# Altium PCB Acoustics Board.PcbDoc (part 1 of 2)
Units mm, origin at the board's own origin, x right, y up, seen from the top; angles counter-clockwise.
Board outline 152.4 x 101.6 mm, 2 copper layers (Top Layer, Bottom Layer); 115 components, 80 nets, 404 pads, 173 vias.
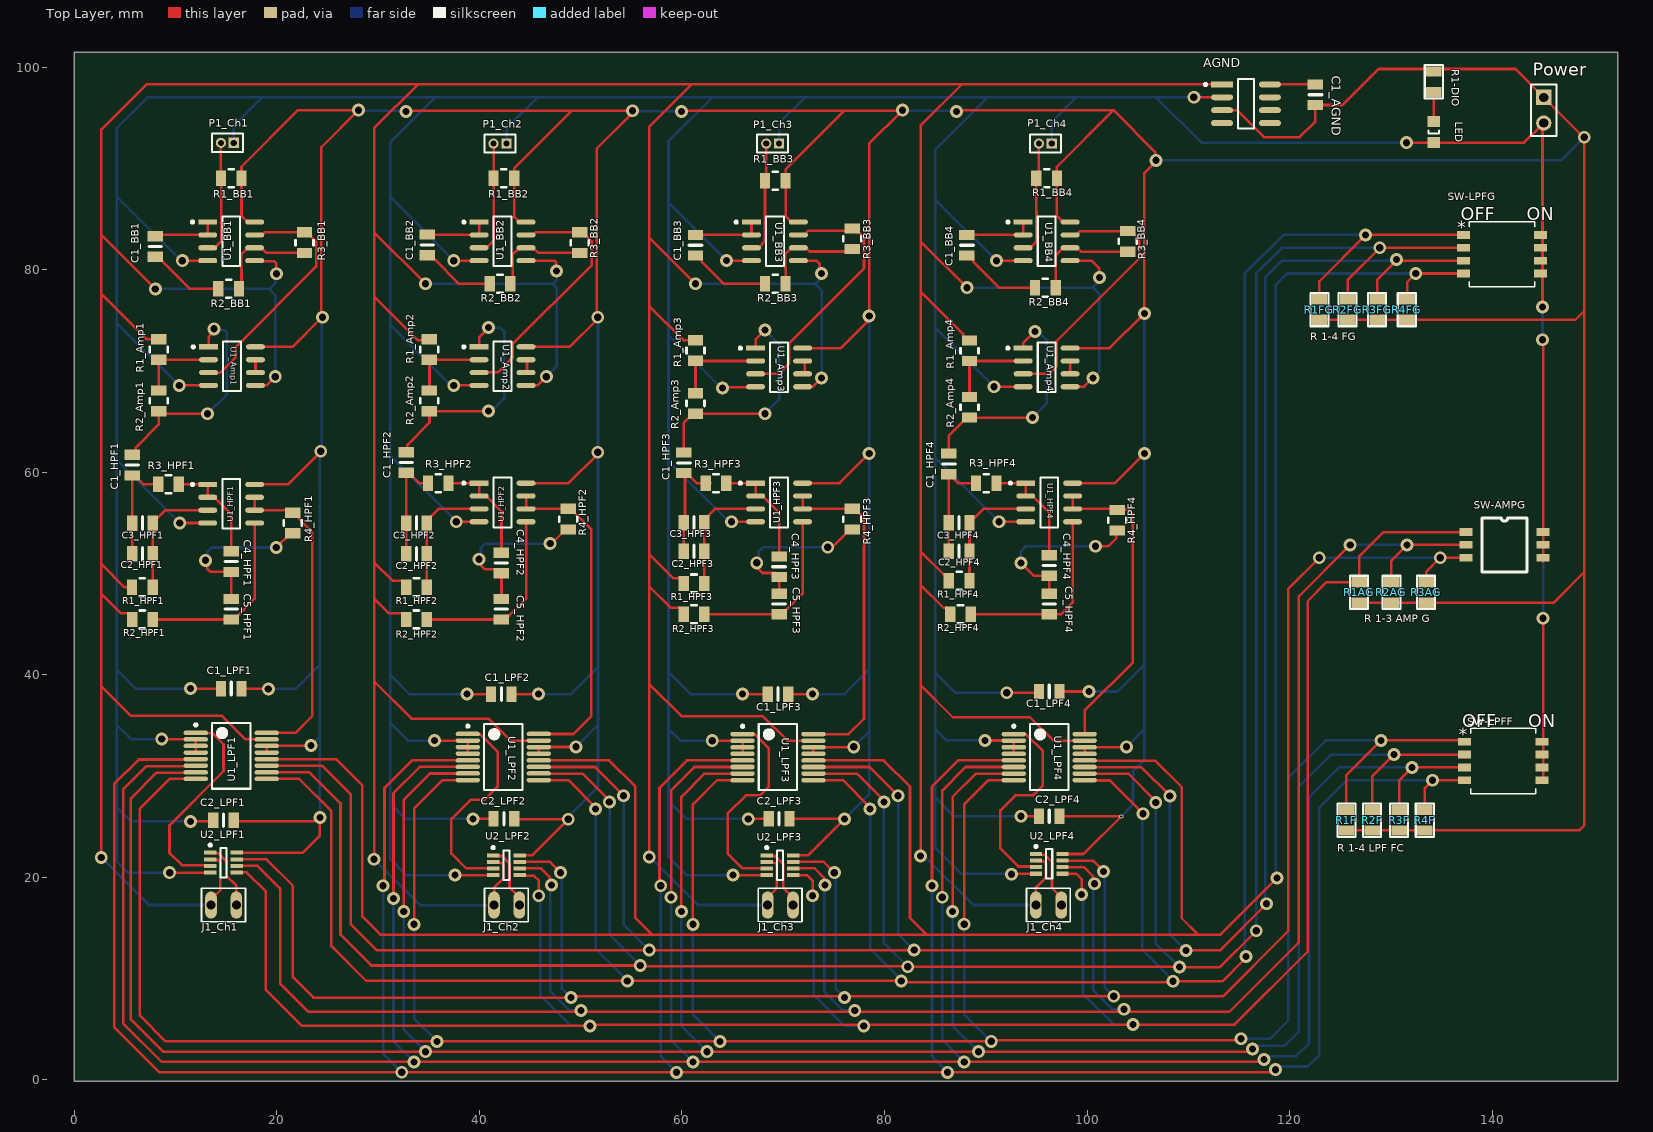
[diagram p0: Top Layer view]
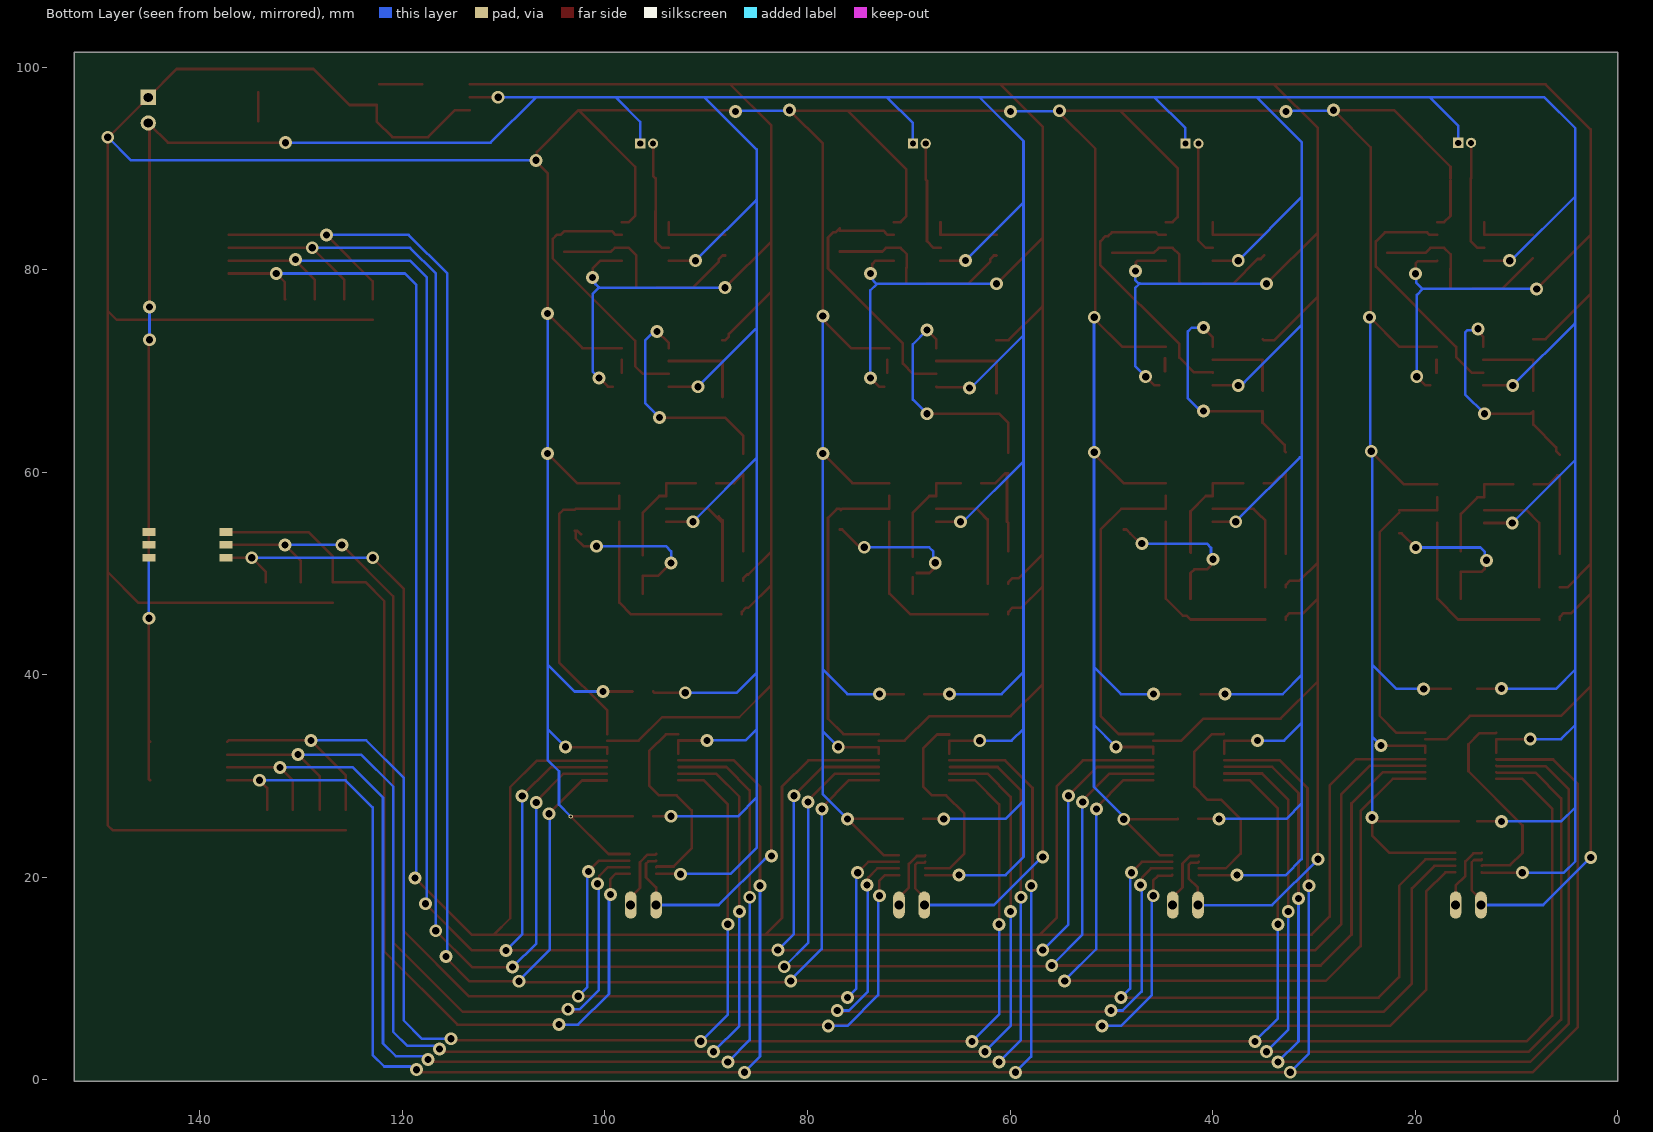
[diagram p1: Bottom Layer view, seen from below]
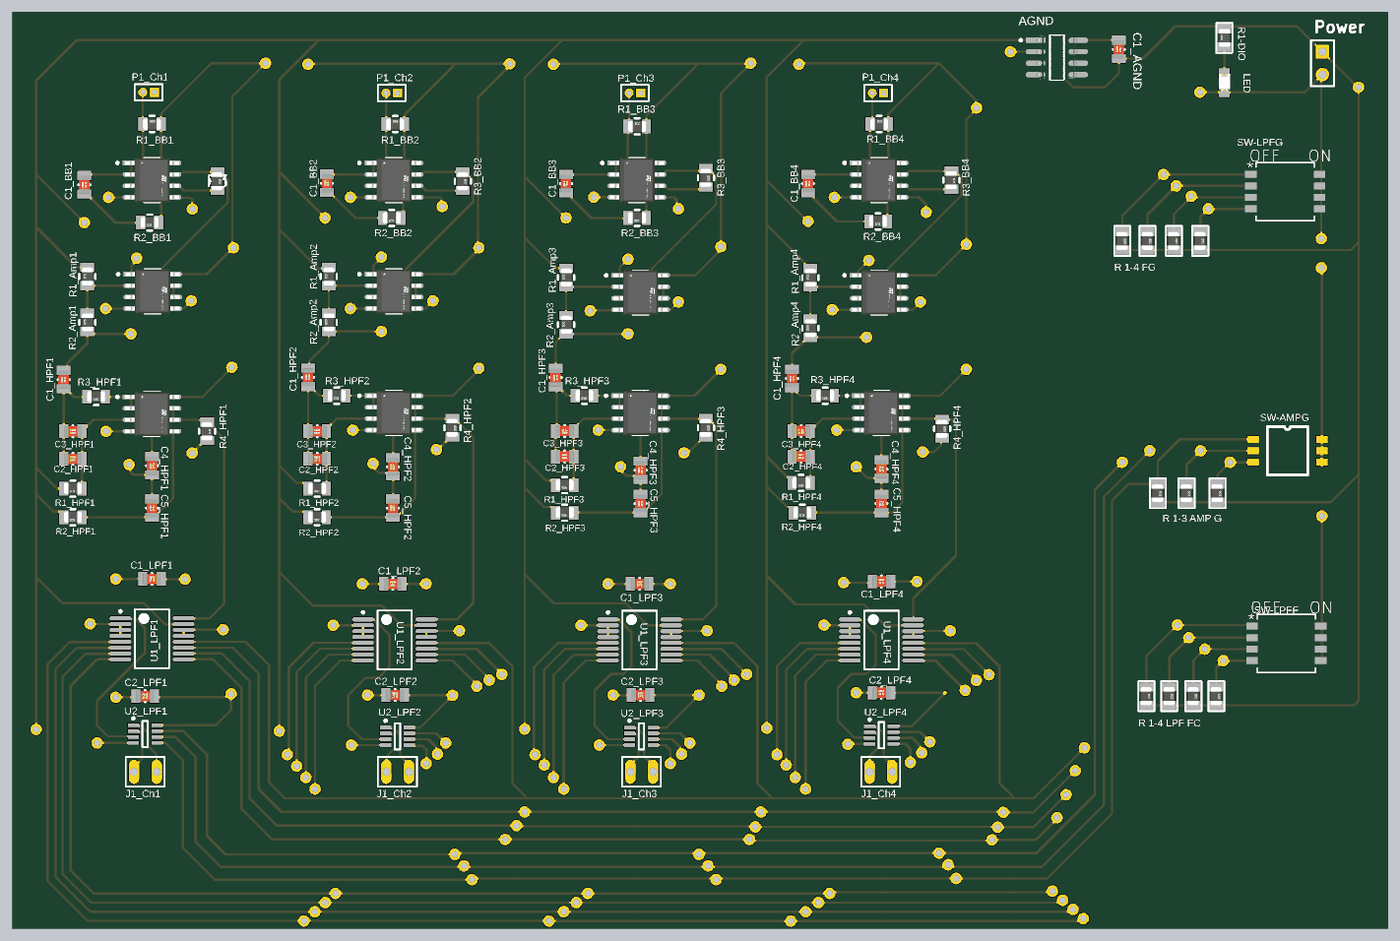
[diagram p3: 3D render of the assembled board from above, using the file's embedded part models]

## Layer stack, top to bottom
Top Solder: solder mask 0.0102, Solder Resist, Dk 3.5
Top Layer: signal copper 0.0356
Dielectric 1: dielectric 0.32, FR-4, Dk 4.8
Bottom Layer: signal copper 0.0356
Bottom Solder: solder mask 0.0102, Solder Resist, Dk 3.5

## Board outline
0,-0.127 152.4,-0.127 152.4,101.473 0,101.473

## Design rules (kind name [scope] priority, off if disabled: settings)
Clearance [All] p1: gap=0.254 ignorepadtopadclearanceinfootprint=TRUE except(0: Arc-Hole Track-Hole SMDPad-Hole THPad-Hole Via-Hole Fill-Hole Poly-Hole Region-Hole Text-Hole)
MinimumSolderMaskSliver [All] p1: minsoldermaskwidth=0.051
PolygonConnect [All] p1: connectstyle=Relief reliefconductorwidth=0.254 reliefentries=4 polygonreliefangle="90 Angle" airgapwidth=0.254
RoutingVias [All] p1: holewidth=0.711 width=1.27 viastyle="Through Hole" minholewidth=0.711 minwidth=1.27 maxholewidth=0.711 maxwidth=1.27
SilkToSilkClearance [All] p1: silktosilkclearance=0.127
SilkToSolderMaskClearance [IsPad] p1: minsilkscreentomaskgap=0.127 clearancetoexposedcopper=TRUE
SolderMaskExpansion [All] p1: expansion=0.102 istentingtop=FALSE
Width [All] p1: maxlimit=0.254 minlimit=0.254 preferedwidth=0.254
27 further rules are at their usual default settings.

## Classes and differential pairs
channel class "Low Pass Filter": LPF1 LPF2 LPF3 LPF4
channel class "High Pass Filter": HPF1 HPF2 HPF3 HPF4
channel class Channel: Ch1 Ch2 Ch3 Ch4
channel class BufferBias: BB1 BB2 BB3 BB4
channel class AmpCKT: Amp1 Amp2 Amp3 Amp4
net class LPF_G_SEL[3..0]: LPF_G_SEL0 LPF_G_SEL1 LPF_G_SEL2 LPF_G_SEL3
net class LPF_FC_SEL[3..0]: LPF_FC_SEL0 LPF_FC_SEL1 LPF_FC_SEL2 LPF_FC_SEL3
net class AMP_G_SEL[2..0]: AMP_G_SEL0 AMP_G_SEL1 AMP_G_SEL2
component class LPF4: C1_LPF4 C2_LPF4 U1_LPF4 U2_LPF4
component class LPF3: C1_LPF3 C2_LPF3 U1_LPF3 U2_LPF3
component class LPF2: C1_LPF2 C2_LPF2 U1_LPF2 U2_LPF2
component class LPF1: C1_LPF1 C2_LPF1 U1_LPF1 U2_LPF1
component class HPF4: "1.47 nF_HPF4" 1.78nF_HPF4 C1_HPF4 C2_HPF4 C3_HPF4 C4_HPF4 C5_HPF4 R1_HPF4 R2_HPF4 R3_HPF4 R4_HPF4 U1_HPF4
component class HPF3: "1.47 nF_HPF3" 1.78nF_HPF3 C1_HPF3 C2_HPF3 C3_HPF3 C4_HPF3 C5_HPF3 R1_HPF3 R2_HPF3 R3_HPF3 R4_HPF3 U1_HPF3
component class HPF2: "1.47 nF_HPF2" 1.78nF_HPF2 C1_HPF2 C2_HPF2 C3_HPF2 C4_HPF2 C5_HPF2 R1_HPF2 R2_HPF2 R3_HPF2 R4_HPF2 U1_HPF2
component class HPF1: "1.47 nF_HPF1" 1.78nF_HPF1 C1_HPF1 C2_HPF1 C3_HPF1 C4_HPF1 C5_HPF1 R1_HPF1 R2_HPF1 R3_HPF1 R4_HPF1 U1_HPF1
component class Ch4: J1_Ch4 P1_Ch4
component class Ch3: J1_Ch3 P1_Ch3
component class Ch2: J1_Ch2 P1_Ch2
component class Ch1: J1_Ch1 P1_Ch1
component class BB4: C1_BB4 R1_BB4 R2_BB4 R3_BB4 U1_BB4
component class BB3: C1_BB3 R1_BB3 R2_BB3 R3_BB3 U1_BB3
component class BB2: C1_BB2 R1_BB2 R2_BB2 R3_BB2 U1_BB2
component class BB1: C1_BB1 R1_BB1 R2_BB1 R3_BB1 U1_BB1
component class Amp4: R1_Amp4 R2_Amp4 U1_Amp4
component class Amp3: R1_Amp3 R2_Amp3 U1_Amp3
component class Amp2: R1_Amp2 R2_Amp2 U1_Amp2
component class Amp1: R1_Amp1 R2_Amp1 U1_Amp1
component class "Acoustics Board": AGND C1_AGND LED Power R1-DIO R1AG R1F R1FG R2AG R2F R2FG R3AG R3F R3FG R4F R4FG SW-AMPG SW-LPFF SW-LPFG SW_AMPG SW_LPFF SW_LPFG

## Components (designator, comment, footprint, x,y, rotation, side; value= is the part's Value field where it differs from the comment)
AGND "TLE2426CDR" FP-D0008A-IPC_B 115.697,96.393 r0 top value=N/A
C1_AGND "1µF" SMD-0805C 122.555,97.282 r0 top
C1_BB1 "5100 pF" SMD-0805C 8.001,82.296 r0 top value=5100pF (schematic designator C1)
C1_BB2 "5100 pF" SMD-0805C 34.861,82.458 r0 top value=5100pF (schematic designator C1)
C1_BB3 "5100 pF" SMD-0805C 61.341,82.423 r0 top value=5100pF (schematic designator C1)
C1_BB4 "5100 pF" SMD-0805C 88.138,82.423 r0 top value=5100pF (schematic designator C1)
C1_HPF1 "1200 pF" SMD-0805C 5.715,60.706 r0 top value=1200pF (schematic designator C1)
C1_HPF2 "1200 pF" SMD-0805C 32.766,60.96 r0 top value=1200pF (schematic designator C1)
C1_HPF3 "1200 pF" SMD-0805C 60.198,60.938 r0 top value=1200pF (schematic designator C1)
C1_HPF4 "1200 pF" SMD-0805C 86.36,60.833 r0 top value=1200pF (schematic designator C1)
C1_LPF1 "0.10µF" SMD-0805C 15.494,38.641 r270 top (schematic designator C1)
C1_LPF2 "0.10µF" SMD-0805C 42.164,38.1 r270 top (schematic designator C1)
C1_LPF3 "0.10µF" SMD-0805C 69.484,38.1 r270 top (schematic designator C1)
C1_LPF4 "0.10µF" SMD-0805C 96.266,38.354 r270 top (schematic designator C1)
C2_HPF1 "470 pF" SMD-0805C 6.731,51.943 r270 top value=470pF (schematic designator C2)
C2_HPF2 "470 pF" SMD-0805C 33.782,51.943 r270 top value=470pF (schematic designator C2)
C2_HPF3 "470 pF" SMD-0805C 61.192,52.196 r270 top value=470pF (schematic designator C2)
C2_HPF4 "470 pF" SMD-0805C 87.376,52.196 r270 top value=470pF (schematic designator C2)
C2_LPF1 "0.10µF" SMD-0805C 14.732,25.654 r270 top (schematic designator C2)
C2_LPF2 "0.10µF" SMD-0805C 42.418,25.781 r270 top (schematic designator C2)
C2_LPF3 "0.10µF" SMD-0805C 69.596,25.78 r270 top (schematic designator C2)
C2_LPF4 "0.10µF" SMD-0805C 96.266,26.035 r270 top (schematic designator C2)
C3_HPF1 "470pF" SMD-0805C 6.731,54.991 r90 top (schematic designator C3)
C3_HPF2 "470pF" SMD-0805C 33.782,54.991 r90 top (schematic designator C3)
C3_HPF3 "470pF" SMD-0805C 61.192,55.012 r90 top (schematic designator C3)
C3_HPF4 "470pF" SMD-0805C 87.376,55.012 r90 top (schematic designator C3)
C4_HPF1 "1800pF" SMD-0805C 15.494,51.181 r0 top (schematic designator C4)
C4_HPF2 "1800pF" SMD-0805C 42.164,51.054 r0 top (schematic designator C4)
C4_HPF3 "1800pF" SMD-0805C 69.596,50.673 r0 top (schematic designator C4)
C4_HPF4 "1800pF" SMD-0805C 96.266,50.8 r0 top (schematic designator C4)
C5_HPF1 "1500pF" SMD-0805C 15.494,46.482 r0 top (schematic designator C5)
C5_HPF2 "1500pF" SMD-0805C 42.164,46.482 r0 top (schematic designator C5)
C5_HPF3 "1500pF" SMD-0805C 69.596,46.99 r0 top (schematic designator C5)
C5_HPF4 "1500pF" SMD-0805C 96.266,46.99 r0 top (schematic designator C5)
J1_Ch1 "Wire output for RCY connectors" WireOut 16.002,17.272 r180 top value=N/A (schematic designator J1)
J1_Ch2 "Wire output for RCY connectors" WireOut 43.942,17.272 r180 top value=N/A (schematic designator J1)
J1_Ch3 "Wire output for RCY connectors" WireOut 70.968,17.272 r180 top value=N/A (schematic designator J1)
J1_Ch4 "Wire output for RCY connectors" WireOut 97.456,17.272 r180 top value=N/A (schematic designator J1)
LED "150080SS75000" 0805_A 134.239,93.599 r90 top value=1.9V
P1_Ch1 "MHDR1X2" MHDR1X2 15.748,92.535 r180 top value=N/A (schematic designator P1)
P1_Ch2 "MHDR1X2" MHDR1X2 42.672,92.456 r180 top value=N/A (schematic designator P1)
P1_Ch3 "MHDR1X2" MHDR1X2 69.596,92.456 r180 top value=N/A (schematic designator P1)
P1_Ch4 "MHDR1X2" MHDR1X2 96.52,92.456 r180 top value=N/A (schematic designator P1)
Power "Header 2" HDR1X2 145.098,97.028 r270 top value=N/A
R1-DIO "300" SMD-0805-RES 134.239,98.552 r0 top
R1_Amp1 "1K" SMD-0805-RES 8.334,72.136 r0 top value=1k (schematic designator R1)
R1_Amp2 "1K" SMD-0805-RES 35.052,72.136 r0 top value=1k (schematic designator R1)
R1_Amp3 "1K" SMD-0805-RES 61.341,72.031 r0 top value=1k (schematic designator R1)
R1_Amp4 "1K" SMD-0805-RES 88.392,72.009 r0 top value=1k (schematic designator R1)
R1_BB1 "4.7K" SMD-0805-RES 15.494,89.027 r270 top value=4.7k (schematic designator R1)
R1_BB2 "4.7K" SMD-0805-RES 42.418,89.027 r270 top value=4.7k (schematic designator R1)
R1_BB3 "4.7K" SMD-0805-RES 69.215,88.773 r270 top value=4.7k (schematic designator R1)
R1_BB4 "4.7K" SMD-0805-RES 96.012,89.027 r270 top value=4.7k (schematic designator R1)
R1_HPF1 "11.3K" SMD-0805-RES 6.721,48.641 r90 top value=11.3k (schematic designator R1)
R1_HPF2 "11.3K" SMD-0805-RES 33.782,48.641 r90 top value=11.3k (schematic designator R1)
R1_HPF3 "11.3K" SMD-0805-RES 61.192,49.023 r90 top value=11.3k (schematic designator R1)
R1_HPF4 "11.3K" SMD-0805-RES 87.376,49.276 r90 top value=11.3k (schematic designator R1)
R1AG "10k" SMD-0805-RES 126.873,48.133 r180 top
R1F "10k" SMD-0805-RES 125.603,25.654 r180 top
R1FG "10k" SMD-0805-RES 122.936,76.073 r180 top
R2_Amp1 "10K" SMD-0805-RES 8.334,67.056 r0 top value=10k (schematic designator R2)
R2_Amp2 "10K" SMD-0805-RES 35.052,67.056 r0 top value=10k (schematic designator R2)
R2_Amp3 "10K" SMD-0805-RES 61.341,66.802 r0 top value=10k (schematic designator R2)
R2_Amp4 "10K" SMD-0805-RES 88.392,66.421 r0 top value=10k (schematic designator R2)
R2_BB1 "10K" SMD-0805-RES 15.24,78.105 r90 top value=10k (schematic designator R2)
R2_BB2 "10K" SMD-0805-RES 42.037,78.613 r90 top value=10k (schematic designator R2)
R2_BB3 "10K" SMD-0805-RES 69.215,78.612 r90 top value=10k (schematic designator R2)
R2_BB4 "10K" SMD-0805-RES 95.885,78.232 r90 top value=10k (schematic designator R2)
R2_HPF1 "12.7K" SMD-0805-RES 6.731,45.466 r90 top value=12.7k (schematic designator R2)
R2_HPF2 "12.7K" SMD-0805-RES 33.782,45.466 r90 top value=12.7k (schematic designator R2)
R2_HPF3 "12.7K" SMD-0805-RES 61.192,45.973 r90 top value=12.7k (schematic designator R2)
R2_HPF4 "12.7K" SMD-0805-RES 87.503,45.974 r90 top value=12.7k (schematic designator R2)
R2AG "10k" SMD-0805-RES 130.048,48.133 r180 top
R2F "10k" SMD-0805-RES 128.143,25.654 r180 top
R2FG "10k" SMD-0805-RES 125.73,76.073 r180 top
R3_BB1 "10K" SMD-0805-RES 22.733,82.677 r180 top value=10k (schematic designator R3)
R3_BB2 "10K" SMD-0805-RES 49.911,82.677 r180 top value=10k (schematic designator R3)
R3_BB3 "10K" SMD-0805-RES 76.835,83.058 r180 top value=10k (schematic designator R3)
R3_BB4 "10K" SMD-0805-RES 104.013,82.804 r180 top value=10k (schematic designator R3)
R3_HPF1 "10.2K" SMD-0805-RES 9.312,58.801 r90 top value=10.2k (schematic designator R3)
R3_HPF2 "10.2K" SMD-0805-RES 35.941,58.928 r90 top value=10.2k (schematic designator R3)
R3_HPF3 "10.2K" SMD-0805-RES 63.373,58.928 r90 top value=10.2k (schematic designator R3)
R3_HPF4 "10.2K" SMD-0805-RES 90.043,58.928 r90 top value=10.2k (schematic designator R3)
R3AG "10k" SMD-0805-RES 133.477,48.133 r180 top
R3F "10k" SMD-0805-RES 130.81,25.654 r180 top
R3FG "10k" SMD-0805-RES 128.651,76.073 r180 top
R4_HPF1 "4.87K" SMD-0805-RES 21.59,54.991 r180 top value=4.87k (schematic designator R4)
R4_HPF2 "4.87K" SMD-0805-RES 48.768,55.372 r180 top value=4.87k (schematic designator R4)
R4_HPF3 "4.87K" SMD-0805-RES 76.835,55.372 r180 top value=4.87k (schematic designator R4)
R4_HPF4 "4.87K" SMD-0805-RES 102.997,55.266 r180 top value=4.87k (schematic designator R4)
R4F "10k" SMD-0805-RES 133.35,25.654 r180 top
R4FG "10k" SMD-0805-RES 131.572,76.073 r180 top
SW-AMPG "DIP-3" DIP6 137.414,54.102 r0 top
SW-LPFF "1571983-5" SW4_1571983_4P_TEC 141.097,31.496 r0 top
SW-LPFG "1571983-5" SW4_1571983_4P_TEC 140.97,81.534 r0 top
U1_Amp1 "LM358ADT" FP-SO8-IPC_C 15.573,70.485 r0 top (schematic designator U1)
U1_Amp2 "LM358ADT" FP-SO8-IPC_C 42.291,70.485 r0 top (schematic designator U1)
U1_Amp3 "LM358ADT" FP-SO8-IPC_C 69.596,70.358 r0 top (schematic designator U1)
U1_Amp4 "LM358ADT" FP-SO8-IPC_C 96.012,70.358 r0 top (schematic designator U1)
U1_BB1 "LM358ADT" FP-SO8-IPC_C 15.494,82.804 r0 top value=N/A (schematic designator U1)
U1_BB2 "LM358ADT" FP-SO8-IPC_C 42.291,82.804 r0 top value=N/A (schematic designator U1)
U1_BB3 "LM358ADT" FP-SO8-IPC_C 69.185,82.804 r0 top value=N/A (schematic designator U1)
U1_BB4 "LM358ADT" FP-SO8-IPC_C 96.012,82.804 r0 top value=N/A (schematic designator U1)
U1_HPF1 "LM358ADT" FP-SO8-IPC_C 15.494,56.896 r0 top value=N/A (schematic designator U1)
U1_HPF2 "LM358ADT" FP-SO8-IPC_C 42.291,57.023 r0 top value=N/A (schematic designator U1)
U1_HPF3 "LM358ADT" FP-SO8-IPC_C 69.596,57.023 r0 top value=N/A (schematic designator U1)
U1_HPF4 "LM358ADT" FP-SO8-IPC_C 96.266,57.023 r0 top value=N/A (schematic designator U1)
U1_LPF1 "LTC1564IG#PBF" LT-G-16_M 15.494,32.004 r0 top value=N/A (schematic designator U1)
U1_LPF2 "LTC1564IG#PBF" LT-G-16_M 42.362,31.888 r0 top value=N/A (schematic designator U1)
U1_LPF3 "LTC1564IG#PBF" LT-G-16_M 69.484,31.876 r0 top value=N/A (schematic designator U1)
U1_LPF4 "LTC1564IG#PBF" LT-G-16_M 96.266,31.877 r0 top value=N/A (schematic designator U1)
U2_LPF1 "LTC6910-3CTS8#TRPBF" LT-TS8-8-TSOT-23_V 14.732,21.463 r0 top value=N/A (schematic designator U2)
U2_LPF2 "LTC6910-3CTS8#TRPBF" LT-TS8-8-TSOT-23_V 42.672,21.209 r0 top value=N/A (schematic designator U2)
U2_LPF3 "LTC6910-3CTS8#TRPBF" LT-TS8-8-TSOT-23_V 69.683,21.208 r0 top value=N/A (schematic designator U2)
U2_LPF4 "LTC6910-3CTS8#TRPBF" LT-TS8-8-TSOT-23_V 96.266,21.336 r0 top value=N/A (schematic designator U2)

## Footprints (in the part's own frame and the unit in brackets; to place one, negate y for a bottom-side part, rotate by r counter-clockwise, add the part's x,y. Pads: shape width x height; smd on the part's side, far side on the other; paste and mask are expansions set on the pad)
0805_A [mm] "Chip LED, 2-Leads, Body 2.0x1.3mm, IPC Medium Density"
  rect 1.1x1.2 smd: 1(-1.05,0) 2(1.05,0)
  silkscreen extent -0.15,-0.5 0.15,0.5, body extent -1,-0.62 1,0.63, height 0.68
DIP6 [mm]
  rect 1.27x0.76 all layers, no hole: 1(0,0) 2(0,-1.27) 3(0,-2.54) 4(7.62,-2.54) 5(7.62,-1.27) 6(7.62,0)
  silkscreen extent 1.57,-3.94 6.05,1.4
FP-D0008A-IPC_B [mm]
  rect 2.169x0.582 smd paste+0 mask+0: 1(-2.364,1.905)
  rrect100% 2.169x0.582 smd paste+0 mask+0: 2(-2.364,0.635) 3(-2.364,-0.635) 4(-2.364,-1.905) 5(2.364,-1.905) 6(2.364,-0.635) 7(2.364,0.635) 8(2.364,1.905)
  silkscreen extent -4.12,-2.45 0.78,2.45, body extent -3.7,-2.7 3.7,2.7, height 0.25
FP-SO8-IPC_C [mm]
  rect 1.874x0.512 smd paste+0 mask+0: 1(-2.316,1.905)
  rrect100% 1.874x0.512 smd paste+0 mask+0: 2(-2.316,0.635) 3(-2.316,-0.635) 4(-2.316,-1.905) 5(2.316,-1.905) 6(2.316,-0.635) 7(2.316,0.635) 8(2.316,1.905)
  silkscreen extent -3.95,-2.45 0.88,2.45, body extent -3.35,-2.55 3.35,2.55, height 0.25
HDR1X2 [mm] "Connector; Header; 2 Position"
  rect 1.5x1.5 hole 0.9: 1(0,0)
  round 1.5 hole 0.9: 2(2.54,0)
  silkscreen extent -1.27,-1.27 3.81,1.27
LT-G-16_M [mm] "SOP, 16-Leads, Body 6.2x5.3mm, Pitch 0.65mm, IPC Low Density"
  oval 2.4x0.45 smd: 1(-3.5,2.275) 2(-3.5,1.625) 3(-3.5,0.975) 4(-3.5,0.325) 5(-3.5,-0.325) 6(-3.5,-0.975) 7(-3.5,-1.625) 8(-3.5,-2.275) 9(3.5,-2.275) 10(3.5,-1.625) 11(3.5,-0.975) 12(3.5,-0.325) 13(3.5,0.325) 14(3.5,0.975) 15(3.5,1.625) 16(3.5,2.275)
  silkscreen extent -3.62,-3.25 1.9,3.25, body extent -2.8,-3.25 2.8,3.25, height 2
LT-TS8-8-TSOT-23_V [mm] "SOT23, 8-Leads, Body 2.90x1.63mm, Pitch 0.65mm, IPC High Density, Recommended"
  rect 1.22x0.4 smd: 1(-1.31,0.975) 2(-1.31,0.325) 3(-1.31,-0.325) 4(-1.31,-0.975) 5(1.31,-0.975) 6(1.31,-0.325) 7(1.31,0.325) 8(1.31,0.975)
  silkscreen extent -1.43,-1.45 0.3,1.85, body extent -0.87,-1.45 0.88,1.45, height 1
MHDR1X2 [mm] "Connector; Header; 2 Position"
  rect 1x1 hole 0.6: 1(0,0)
  round 1 hole 0.6: 2(1.27,0)
  silkscreen extent -0.9,-0.9 2.17,0.9
SMD-0805-RES [mil]
  rect 60x40 smd: 1(0,40) 2(0,-40)
  silkscreen extent -35,-65 35,65, body extent -24,-39 26,39, height 31
SMD-0805C [mil]
  rect 60x40 smd: 1(0,40) 2(0,-40)
  silkscreen extent -25,0 25,0, body extent -25,-39 25,39, height 35
SW4_1571983_4P_TEC [mil]
  rect 50x30 smd paste+0 mask+0: 1(-150,75) 2(-150,25) 3(-150,-25) 4(-150,-75) 5(150,-75) 6(150,-25) 7(150,25) 8(150,75)
  silkscreen extent -127,-127 127,127, body extent 0,0 10,10, height 10
WireOut [mil]
  oval 45x105 hole 35: 1(0,0) 2(98.43,0)
  silkscreen extent -35,-65 135,65

## Part data
AGND: library part CMP-04916-000011-1, "Ground Reference (Virtual) Voltage Reference IC Adjustable 2V 20 VV ±1% 20 mA 8-SOIC", Manufacturer="Texas Instruments", Manufacturer Part Number=TLE2426MD, Operating Temperature="-55°C ~ 125°C", Package / Case=8-SOIC, Datasheet Link=https://www.digikey.com/en/products/detail/texas-instruments/TLE2426MD/1676989, Descriptions="Ground Reference (Virtual) Voltage Reference IC Adjustable 2V 20 VV ±1% 20 mA 8-SOIC"
C1_AGND: library part GCJ219R71C105KA01D, Manufacturer=KEMET, Manufacturer Part Number=C0805C105K3RAC7800, Operating Temperature="-55°C ~ 125°C", Package / Case="0805 (2012 Metric)", Datasheet Link=https://api.kemet.com/component-edge/download/datasheet/C0805C105K3RACTU.pdf, Descriptions="1 µF ±10% 25V Ceramic Capacitor X7R 0805 (2012 Metric)"
C1_BB1 C1_BB2 C1_BB3 C1_BB4: library part GRM2195C1H512JA01D, Manufacturer=KEMET, Manufacturer Part Number=C0805C512F4HACAUTO, Operating Temperature="-55°C ~ 125°C", Package / Case="0805 (2012 Metric)", Datasheet Link=https://content.kemet.com/datasheets/KEM_C1007_X8R_ULTRA_150C_SMD.pdf, Descriptions="5100 pF ±1% 16V Ceramic Capacitor X8R 0805 (2012 Metric)"
C1_HPF1 C1_HPF2 C1_HPF3 C1_HPF4: library part GRM216R71E122KA01D, Manufacturer=KEMET, Manufacturer Part Number=C0805C122J2GAC7800, Operating Temperature="-55°C ~ 125°C", Package / Case="0805 (2012 Metric)", Datasheet Link=https://api.kemet.com/component-edge/download/datasheet/C0805C122J2GAC7800.pdf, Descriptions="1200 pF ±5% 200V Ceramic Capacitor C0G, NP0 0805 (2012 Metric)"
C1_LPF1 C1_LPF2 C1_LPF3 C1_LPF4 C2_LPF1 C2_LPF2 C2_LPF3 C2_LPF4: library part GCD21BR71H104KA01L, Manufacturer=KEMET, Manufacturer Part Number=C0805C104K3RAC7800, Operating Temperature="-55°C ~ 125°C", Package / Case="0805 (2012 Metric)", Datasheet Link=https://api.kemet.com/component-edge/download/datasheet/C0805C104K3RACTU.pdf, Descriptions="0.1 µF ±10% 25V Ceramic Capacitor X7R 0805 (2012 Metric)"
C2_HPF1 C2_HPF2 C2_HPF3 C2_HPF4 C3_HPF1 C3_HPF2 C3_HPF3 C3_HPF4: library part GCM2165C1H471JA16D, Manufacturer=KEMET, Manufacturer Part Number=C0805C471J1GAC7800, Operating Temperature="-55°C ~ 125°C", Package / Case="0805 (2012 Metric)", Datasheet Link=https://api.kemet.com/component-edge/download/datasheet/C0805C471J1GACTU.pdf, Descriptions="470 pF ±5% 100V Ceramic Capacitor C0G, NP0 0805 (2012 Metric)"
C4_HPF1 C4_HPF2 C4_HPF3 C4_HPF4: library part GRM216R71E182KA01D, Manufacturer=KEMET, Manufacturer Part Number=C0805C182K5RAC7800, Operating Temperature="-55°C ~ 125°C", Package / Case="0805 (2012 Metric)", Datasheet Link=https://api.kemet.com/component-edge/download/datasheet/C0805C182K5RACTU.pdf, Descriptions="1800 pF ±10% 50V Ceramic Capacitor X7R 0805 (2012 Metric)"
C5_HPF1 C5_HPF2 C5_HPF3 C5_HPF4: library part GCJ216R71H152KA01D, Manufacturer=KEMET, Manufacturer Part Number=C0805C152JAGAC7800, Operating Temperature="-55°C ~ 125°C", Package / Case="0805 (2012 Metric)", Datasheet Link=https://api.kemet.com/component-edge/download/datasheet/C0805C152JAGAC7800.pdf, Descriptions="1500 pF ±5% 250V Ceramic Capacitor C0G, NP0 0805 (2012 Metric)"
J1_Ch1 J1_Ch2 J1_Ch3 J1_Ch4: library part WireOut, Manufacturer="JST Sales America Inc.", Manufacturer Part Number=SYP-02T-1, Package / Case="N/A Through Hole", Datasheet Link=https://www.jst-mfg.com/product/pdf/eng/eRCY.pdf, Descriptions="2 Rectangular Connectors - Housings Plug Red 0.098\" (2.50mm)"
LED: library part CMP-1426-00010-1, "Red 630nm LED Indication - Discrete 1.9V 0805 (2012 Metric)", Manufacturer="Wuerth Elektronik", Operating Temperature="-40°C ~ 85°C", Package / Case="0805 (2012 Metric)", Datasheet Link=https://www.we-online.com/katalog/datasheet/150080SS75000.pdf, Descriptions="Red 630nm LED Indication - Discrete 1.9V 0805 (2012 Metric)", Manufacturer Part Number=150080SS75000
Power: Package / Case=HDR1X2
R1-DIO: library part ERJ-6ENF1002V, Manufacturer="Stackpole Electronics Inc", Manufacturer Part Number=RNCF0805DTE300R, Operating Temperature="-55°C ~ 155°C", Package / Case="0805 (2012 Metric)", Datasheet Link=https://www.seielect.com/catalog/sei-rncf.pdf, Descriptions="300 Ohms ±0.5% 0.125W, 1/8W Chip Resistor 0805 (2012 Metric) Automotive AEC-Q200 Thin Film"
R1_Amp1 R1_Amp2 R1_Amp3 R1_Amp4: library part ERJ-6ENF1001V, Manufacturer="Stackpole Electronics Inc", Manufacturer Part Number=RMCF0805FT1K00, Operating Temperature="-55°C ~ 155°C", Package / Case="0805 (2012 Metric)", Datasheet Link=https://www.seielect.com/catalog/sei-rmcf_rmcp.pdf, Descriptions="1 kOhms ±1% 0.125W, 1/8W Chip Resistor 0805 (2012 Metric) Automotive AEC-Q200 Thick Film"
R1_BB1 R1_BB2 R1_BB3 R1_BB4: library part ERJ-6ENF4701V, Manufacturer="Stackpole Electronics Inc", Manufacturer Part Number=RNCF0805DTE4K70, Operating Temperature="-55°C ~ 155°C", Package / Case="0805 (2012 Metric)", Datasheet Link=https://www.seielect.com/catalog/sei-rncf.pdf, Descriptions="RES 4.7K OHM 0.5% 1/8W 0805"
R1_HPF1 R1_HPF2 R1_HPF3 R1_HPF4: library part ERJ-6ENF1132V, Manufacturer="Stackpole Electronics Inc", Manufacturer Part Number=RNCF0805DTE11K3, Operating Temperature="-55°C ~ 155°C", Package / Case="0805 (2012 Metric)", Datasheet Link=https://www.seielect.com/catalog/sei-rncf.pdf, Descriptions="11.3 kOhms ±0.5% 0.125W, 1/8W Chip Resistor 0805 (2012 Metric) Automotive AEC-Q200 Thin Film"
R1AG R1F R1FG R2AG R2F R2FG R3AG R3F R3FG R4F R4FG: library part ERJ-6ENF1002V, Manufacturer="Panasonic Electronic Components", Manufacturer Part Number=RMCF0805JG10K0, Operating Temperature="-55°C ~ 155°C", Package / Case="0805 (2012 Metric)", Datasheet Link=https://www.seielect.com/catalog/sei-rmcf_rmcp.pdf, Descriptions="10 kOhms ±5% 0.125W, 1/8W Chip Resistor 0805 (2012 Metric) Automotive AEC-Q200 Thick Film"
R2_Amp1 R2_Amp2 R2_Amp3 R2_Amp4 R2_BB1 R2_BB2 R2_BB3 R2_BB4 R3_BB1 R3_BB2 R3_BB3 R3_BB4: library part ERJ-6ENF1002V, Manufacturer="Stackpole Electronics Inc", Manufacturer Part Number=RMCF0805JG10K0, Operating Temperature="-55°C ~ 155°C", Package / Case="0805 (2012 Metric)", Datasheet Link=https://www.seielect.com/catalog/sei-rmcf_rmcp.pdf, Descriptions="10 kOhms ±5% 0.125W, 1/8W Chip Resistor 0805 (2012 Metric) Automotive AEC-Q200 Thick Film"
R2_HPF1 R2_HPF2 R2_HPF3 R2_HPF4: library part ERJ-6ENF1272V, Manufacturer="Stackpole Electronics Inc", Manufacturer Part Number=RNCF0805DTE12K7, Operating Temperature="-55°C ~ 155°C", Package / Case="0805 (2012 Metric)", Datasheet Link=https://www.seielect.com/catalog/sei-rncf.pdf, Descriptions="12.7 kOhms ±0.5% 0.125W, 1/8W Chip Resistor 0805 (2012 Metric) Automotive AEC-Q200 Thin Film"
R3_HPF1 R3_HPF2 R3_HPF3 R3_HPF4: library part ERJ-6ENF1022V, Manufacturer="Stackpole Electronics Inc", Manufacturer Part Number=RNCF0805DTE10K2, Operating Temperature="-55°C ~ 155°C", Package / Case="0805 (2012 Metric)", Datasheet Link=https://www.seielect.com/catalog/sei-rncf.pdf, Descriptions="10.2 kOhms ±0.5% 0.125W, 1/8W Chip Resistor 0805 (2012 Metric) Automotive AEC-Q200 Thin Film"
R4_HPF1 R4_HPF2 R4_HPF3 R4_HPF4: library part ERJ-6ENF4871V, Manufacturer="Stackpole Electronics Inc", Manufacturer Part Number=RMCF0805FT4K87, Operating Temperature="-55°C ~ 155°C", Package / Case="0805 (2012 Metric)", Datasheet Link=https://www.seielect.com/catalog/sei-rmcf_rmcp.pdf, Descriptions="4.87 kOhms ±1% 0.125W, 1/8W Chip Resistor 0805 (2012 Metric) Automotive AEC-Q200 Thick Film"
SW-LPFF SW-LPFG: "No Description Available", Mfr_Name="TE Connectivity", Copyright="Copyright (C) 2022 Ultra Librarian. All rights reserved.", Digi-Key_Part_Number_1=450-1762-1-ND, Digi-Key_Part_Number_2=450-1762-2-ND, Digi-Key_Part_Number_3=450-1762-6-ND, Manufacturer_Part_Number=1571983-5, RefDes=RefDes, Type=DEV
U1_Amp1 U1_Amp2 U1_Amp3 U1_Amp4 U1_BB1 U1_BB2 U1_BB3 U1_BB4 U1_HPF1 U1_HPF2 U1_HPF3 U1_HPF4: library part CMP-12131-000002-1, Manufacturer=STMicroelectronics, Manufacturer Part Number=LM358WDT, Operating Temperature="0°C ~ 70°C", Package / Case=8-SOIC, Datasheet Link=https://www.st.com/content/ccc/resource/technical/document/datasheet/82/55/37/12/85/cc/4c/29/CD00003160.pdf/files/CD00003160.pdf/jcr:content/translations/en.CD00003160.pdf, Descriptions="General Purpose Amplifier 2 Circuit - 8-SOIC", RoHS=TRUE
U1_LPF1 U1_LPF2 U1_LPF3 U1_LPF4: library part CMP-0359-00059-2, Manufacturer="Analog Devices Inc.", Operating Temperature="-40°C ~ 85°C", Package / Case=16-SSOP, Datasheet Link=https://www.analog.com/media/en/technical-documentation/data-sheets/1564fa.pdf, Descriptions="Antialiasing Filter IC Antialiasing 8th Order 150kHz 16-SSOP", Manufacturer Part Number=LTC1564IG#PBF, RoHS=Pb-Free
U2_LPF1 U2_LPF2 U2_LPF3 U2_LPF4: library part CMP-0359-03721-2, Manufacturer="Analog Devices Inc.", Manufacturer Part Number=LTC6910-3CTS8#TRMPBF, Operating Temperature="0°C ~ 70°C", Package / Case=TSOT-23-8, Datasheet Link=https://www.analog.com/media/en/technical-documentation/data-sheets/6910fb.pdf, Descriptions="Programmable Gain Amplifier 1 Circuit Rail-to-Rail TSOT-23-8", RoHS=Pb-Free
P1_Ch1 P1_Ch2 P1_Ch3 P1_Ch4: Package / Case=MHDR1X2

## Via types
v1: diameter 1.27, hole 0.711, Top Layer to Bottom Layer, 172 vias
v2: diameter 0.4, hole 0.2, Top Layer to Bottom Layer, 1 vias

## Nets (pads, with @x,y where several pads share a name; then routed paths per layer and width w, separated by ;. In a path a pad name is that pad's centre, name@x,y a point inside that pad or via, vN(x,y) a via of type N, cw(c..) or ccw(c..) an arc to the next point about the centre after c; other vN are vias at no path point)
AMP_G_SEL0: R1AG.2 SW-AMPG.1 U2_LPF1.5 U2_LPF2.5 U2_LPF3.5 U2_LPF4.5 | length 234.4
  Top Layer w0.254: U2_LPF1.5@16.042,20.488 17.021,20.488 18.923,18.586 18.923,8.89 22.479,5.334 v1(50.927,5.334) 51.054,5.461 77.953,5.461 v1(104.536,5.462) 114.568,5.461 121.793,12.686 121.793,47.288 123.654,49.149 R1AG.2@126.873,49.149 126.873,51.689 129.286,54.102 SW-AMPG.1@137.414,54.102 ; U2_LPF2.5@44.003,20.234 44.076,20.161 44.613,20.161 ; 44.614,20.16 45.408,20.16 45.88,19.687 45.88,18.208 v1(45.859,18.186) ; U2_LPF3.5@70.968,20.233 U2_LPF3.5@70.993,20.233 72.36,20.233 72.906,19.687 72.906,18.208 v1(72.884,18.186) ; U2_LPF4.5@97.551,20.361 U2_LPF4.5@97.576,20.361 98.943,20.361 99.489,19.815 99.489,18.336 v1(99.467,18.314)
  Bottom Layer w0.254: v1@45.88,18.186 45.996,18.07 45.996,8.381 49.044,5.333 v1(50.927,5.334) ; v1@72.905,18.186 73.021,18.07 73.021,8.381 76.069,5.333 v1(77.953,5.334) ; v1@99.488,18.314 99.604,18.198 99.604,8.509 102.652,5.461 v1@104.535,5.461
AMP_G_SEL1: R2AG.2 SW-AMPG.2 U2_LPF1.6 U2_LPF2.6 U2_LPF3.6 U2_LPF4.6 | length 231.8
  Top Layer w0.254: U2_LPF1.6@16.042,21.138 18.105,21.138 20.32,18.923 20.32,9.525 23.114,6.731 49.911,6.731 v1(50.038,6.858) 50.165,6.731 114.042,6.731 120.904,13.593 120.904,47.752 v1(125.984,52.832) ; U2_LPF2.6@43.982,20.884 46.087,20.883 46.957,20.013 46.957,19.421 v1@47.115,19.263 ; U2_LPF3.6@71.008,20.883 73.113,20.883 73.983,20.013 73.983,19.421 v1@74.141,19.263 ; U2_LPF4.6@97.591,21.011 99.696,21.011 100.566,20.141 100.566,19.548 v1@100.724,19.391 ; R2AG.2@130.048,49.149 130.048,51.282 v1(131.598,52.832) SW-AMPG.2@137.414,52.832
  Bottom Layer w0.254: v1@47.115,19.22 47.012,19.116 47.012,8.722 48.877,6.857 v1(50.038,6.858) ; v1@74.141,19.22 74.037,19.116 74.037,8.722 75.902,6.857 v1(77.064,6.858) ; v1@100.724,19.347 100.62,19.244 100.62,8.85 102.485,6.985 v1@103.646,6.985 ; v1(125.984,52.832) v1(131.598,52.832)
  other v1: 103.647,6.986 47.115,19.242 74.141,19.242 100.724,19.37
AMP_G_SEL2: R3AG.2 SW-AMPG.3 U2_LPF1.7 U2_LPF2.7 U2_LPF3.7 U2_LPF4.7 | length 224.7
  Top Layer w0.254: U2_LPF1.7@16.042,21.788 18.979,21.788 21.59,19.177 21.59,10.16 23.622,8.128 49.022,8.128 v1(49.032,8.138) 49.149,8.255 113.411,8.255 119.888,14.732 119.888,48.514 v1(122.936,51.562) ; U2_LPF2.7@43.982,21.534 46.976,21.533 v1@48.021,20.488 ; U2_LPF3.7@71.008,21.533 74.002,21.533 v1@75.047,20.488 ; U2_LPF4.7@97.591,21.661 100.585,21.661 v1@101.63,20.616 ; R3AG.2@133.477,49.149 133.477,50.165 v1(134.874,51.562) SW-AMPG.3@137.414,51.562
  Bottom Layer w0.254: v1@48.042,20.467 48.153,20.357 48.153,9.018 v1(49.032,8.138) ; v1@75.068,20.467 75.178,20.357 75.178,9.018 v1(76.058,8.138) ; v1@101.651,20.595 101.761,20.485 101.761,9.146 v1(102.641,8.266) ; v1(122.936,51.562) v1(134.874,51.562)
  other v1: 48.021,20.467 75.047,20.467 101.63,20.595
AMP_OUT_Ch1: J1_Ch1.1 U2_LPF1.1 | length 6.7
  Top Layer w0.254: U2_LPF1.1@13.422,22.438 13.491,22.369 14.258,22.369 15.051,21.576 15.051,20.13 16.002,19.179 J1_Ch1.1@16.002,17.272
AMP_OUT_Ch2: J1_Ch2.1 U2_LPF2.1 | length 6.4
  Top Layer w0.254: U2_LPF2.1@41.383,22.184 41.452,22.115 42.219,22.115 42.973,21.362 42.973,19.024 43.942,18.055 J1_Ch2.1@43.942,17.272
AMP_OUT_Ch3: J1_Ch3.1 U2_LPF3.1 | length 6.4
  Top Layer w0.254: U2_LPF3.1@68.373,22.183 68.442,22.114 69.209,22.114 70.002,21.321 70.002,19 70.968,18.034 J1_Ch3.1@70.968,17.272
AMP_OUT_Ch4: J1_Ch4.1 U2_LPF4.1 | length 6.5
  Top Layer w0.254: U2_LPF4.1@94.956,22.311 95.025,22.242 95.792,22.242 96.539,21.495 96.539,18.951 97.456,18.034 J1_Ch4.1@97.456,17.272
BufferBias_In_Ch1: P1_Ch1.2 R1_BB1.2 U1_BB1.3 | length 11.3
  Top Layer w0.254: U1_BB1.3@13.178,82.169 13.859,82.169 14.496,82.806 14.496,89.009 R1_BB1.2@14.478,89.027 P1_Ch1.2@14.478,92.535
BufferBias_In_Ch2: P1_Ch2.2 R1_BB2.2 U1_BB2.3 | length 11.3
  Top Layer w0.254: U1_BB2.3@39.975,82.169 40.678,82.168 41.424,82.914 41.424,89.005 R1_BB2.2@41.402,89.027 41.424,89.049 41.424,92.434 P1_Ch2.2@41.402,92.456
BufferBias_In_Ch3: P1_Ch3.2 R1_BB3.2 U1_BB3.3 | length 11.3
  Top Layer w0.254: U1_BB3.3@66.869,82.169 67.55,82.169 68.199,82.818 R1_BB3.2@68.199,88.773 68.326,88.9 P1_Ch3.2@68.326,92.456
BufferBias_In_Ch4: P1_Ch4.2 R1_BB4.2 U1_BB4.3 | length 11.3
  Top Layer w0.254: U1_BB4.3@93.696,82.169 94.377,82.169 95.014,82.806 95.014,85.775 94.996,85.793 R1_BB4.2@94.996,89.027 95.25,89.281 P1_Ch4.2@95.25,92.456
GND: AGND.2 C1_LPF1.2 C1_LPF2.2 C1_LPF3.2 C1_LPF4.2 C2_LPF1.2 C2_LPF2.2 C2_LPF3.2 C2_LPF4.2 LED.1 P1_Ch1.1 P1_Ch2.1 P1_Ch3.1 P1_Ch4.1 Power.2 SW-AMPG.4 SW-AMPG.5 SW-AMPG.6 SW-LPFF.5 SW-LPFF.6 SW-LPFF.7 SW-LPFF.8 SW-LPFG.5 SW-LPFG.6 SW-LPFG.7 SW-LPFG.8 U1_Amp1.4 U1_Amp2.4 U1_Amp3.4 U1_Amp4.4 U1_BB1.4 U1_BB2.4 U1_BB3.4 U1_BB4.4 U1_HPF1.4 U1_HPF2.4 U1_HPF3.4 U1_HPF4.4 U1_LPF1.2 U1_LPF1.3 U1_LPF1.4 U1_LPF2.2 U1_LPF2.3 U1_LPF2.4 U1_LPF3.2 U1_LPF3.3 U1_LPF3.4 U1_LPF4.2 U1_LPF4.3 U1_LPF4.4 U2_LPF1.4 U2_LPF2.4 U2_LPF3.4 U2_LPF4.4 | length 841.7
  Top Layer w0.254: v1(8.636,33.655) 8.649,33.642 11.981,33.642 U1_LPF1.2@11.994,33.629 U1_LPF1.3@11.994,32.979 U1_LPF1.4@11.994,32.329 ; v1(9.419,20.468) 13.401,20.468 U2_LPF1.4@13.422,20.488 ; v1(10.366,68.58) U1_Amp1.4@13.257,68.58 ; v1(10.414,54.991) U1_HPF1.4@13.178,54.991 ; v1(10.668,80.899) U1_BB1.4@13.178,80.899 ; v1(11.486,25.527) C2_LPF1.2@13.843,25.527 ; v1(11.486,38.641) 13.843,38.641 ; v1(35.56,33.513) U1_LPF2.2@38.862,33.513 ; v1(37.465,68.58) U1_Amp2.4@39.975,68.58 ; v1(37.465,80.899) U1_BB2.4@39.975,80.899 ; v1(37.592,20.234) U2_LPF2.4@41.362,20.234 ; v1(37.719,55.118) U1_HPF2.4@39.975,55.118 ; v1@38.788,38.099 C1_LPF2.2@41.148,38.1 ; U1_LPF2.4@38.862,32.213 U1_LPF2.3@38.862,32.863 U1_LPF2.2@38.862,33.513 ; v1(39.37,25.781) C2_LPF2.2@41.402,25.781 ; v1(62.992,33.501) U1_LPF3.2@65.902,33.501 ; v1(64.008,68.326) 64.086,68.404 67.231,68.404 U1_Amp3.4@67.28,68.453 ; v1(64.409,80.919) 64.419,80.909 66.859,80.909 U1_BB3.4@66.869,80.899 ; v1(64.898,55.118) U1_HPF3.4@67.28,55.118 ; v1(65.027,20.233) U2_LPF3.4@68.373,20.233 ; U1_LPF3.4@65.984,32.201 U1_LPF3.3@65.984,32.851 U1_LPF3.2@65.984,33.501 ; v1(65.984,38.099) C1_LPF3.2@68.468,38.1 ; v1(66.548,25.78) C2_LPF3.2@68.58,25.78 ; v1(89.916,33.528) 89.929,33.515 92.753,33.515 U1_LPF4.2@92.766,33.502 U1_LPF4.3@92.766,32.852 U1_LPF4.4@92.766,32.202 ; v1(90.805,68.453) U1_Amp4.4@93.696,68.453 ; v1(91.059,80.899) U1_BB4.4@93.696,80.899 ; v1(91.313,55.118) U1_HPF4.4@93.95,55.118 ; v1(92.075,38.227) 95.123,38.227 C1_LPF4.2@95.25,38.354 ; v1(92.548,20.318) 92.59,20.359 94.954,20.359 U2_LPF4.4@94.956,20.361 ; v1(93.472,26.035) C2_LPF4.2@95.25,26.035 ; v1(110.546,97.028) AGND.2@113.333,97.028 ; v1(131.54,92.549) LED.1@134.239,92.549 143.159,92.549 Power.2@144.971,94.361 ; SW-LPFF.5@144.907,29.591 145.034,29.718 145.034,32.131 SW-LPFF.8@145.034,33.401 ; SW-LPFF.8@144.907,33.401 145.034,33.528 v1(145.034,45.593) ; v1(144.971,73.089) 145.034,73.026 145.034,51.181 ; v1(144.971,76.327) 144.971,80.899 144.971,82.169 Power.2@144.971,94.361 ; Power.2@145.098,94.488 Power.2@144.971,94.361
  Bottom Layer w0.254: 4.231,74.716 v1(10.366,68.58) ; v1(8.636,33.655) 5.588,33.655 4.191,35.052 ; v1(9.419,20.468) 5.313,20.468 4.191,21.59 4.191,26.924 ; v1(10.414,54.991) 4.191,61.214 ; v1(10.668,80.899) 10.541,80.899 4.191,87.249 ; v1(11.486,25.527) 5.588,25.527 4.191,26.924 ; v1(11.486,38.641) 6.063,38.641 4.191,40.513 ; P1_Ch1.1@15.748,92.535 15.748,94.234 18.542,97.028 ; v1(35.56,33.513) 32.93,33.512 31.2,35.242 ; v1(37.465,68.58) 37.191,68.579 36.874,68.896 36.852,68.896 31.2,74.548 ; v1@37.465,80.92 31.2,87.185 ; v1(37.592,20.234) 32.767,20.233 31.2,21.8 31.2,27.304 ; v1@37.719,55.139 31.391,61.467 31.2,61.467 ; v1(38.787,38.1) 33.075,38.099 31.2,39.974 ; v1(39.37,25.781) 32.724,25.78 31.2,27.304 ; P1_Ch2.1@42.672,92.456 42.694,92.478 42.694,93.979 45.742,97.028 ; v1(62.992,33.501) 59.844,33.501 58.674,34.671 ; v1(64.008,68.326) 63.881,68.326 58.674,73.533 ; v1(64.409,80.919) 58.674,86.654 ; v1(64.898,55.118) 64.643,55.118 58.674,61.087 ; v1(65.027,20.233) 60.453,20.233 58.674,22.012 58.674,27.559 ; v1(65.984,38.099) 60.834,38.099 58.674,40.259 ; v1(66.548,25.78) 60.453,25.78 58.674,27.559 ; P1_Ch3.1@69.596,92.456 69.596,94.488 72.136,97.028 ; 85.058,86.9 v1(91.059,80.899) ; 85.122,74.136 v1(90.805,68.453) ; v1(89.916,33.528) 86.106,33.528 85.026,34.608 ; v1(91.313,55.118) 85.026,61.404 ; v1(92.075,38.227) 86.995,38.227 85.026,40.195 ; v1(92.548,20.318) 92.509,20.357 87.593,20.357 85.026,22.924 85.026,27.877 ; v1(93.472,26.035) 86.868,26.035 85.026,27.877 ; P1_Ch4.1@96.52,92.456 96.52,94.615 98.933,97.028 ; v1(110.546,97.028) 106.807,97.028 ; v1(131.54,92.549) 111.286,92.549 106.807,97.028 ; v1(144.971,73.089) v1(144.971,76.327) ; v1(145.034,45.593) 145.034,51.181 ; 4.191,26.924 4.191,35.052 ; 4.191,35.052 4.191,40.513 ; 4.191,40.513 4.191,61.214 ; 4.191,61.214 4.191,74.716 4.191,87.249 ; 4.191,87.249 4.191,93.98 7.239,97.028 18.542,97.028 ; 18.542,97.028 35.56,97.028 ; 31.2,27.304 31.2,35.242 ; 31.2,35.242 31.2,39.974 ; 31.2,39.974 31.2,61.467 ; 31.2,61.467 31.2,74.548 ; 31.2,74.548 31.2,87.185 ; 31.2,87.185 31.2,92.606 35.56,96.966 35.56,97.028 ; 35.56,97.028 45.742,97.028 ; 45.742,97.028 62.992,97.028 ; 58.674,27.559 58.674,34.671 ; 58.674,34.671 58.674,40.259 ; 58.674,40.259 58.674,61.087 ; 58.674,61.087 58.674,73.533 ; 58.674,73.533 58.674,86.654 ; 58.674,86.654 58.674,92.71 62.992,97.028 ; 62.992,97.028 72.136,97.028 ; 72.136,97.028 90.17,97.028 ; 85.026,27.877 85.026,34.608 ; 85.026,34.608 85.026,40.195 ; 85.026,40.195 85.026,61.404 ; 85.026,61.404 85.026,74.136 85.026,86.9 85.026,91.885 90.17,97.028 ; 90.17,97.028 98.933,97.028 ; 98.933,97.028 106.807,97.028
LPF_FC_SEL0: R1F.2 SW-LPFF.1 U1_LPF1.8 U1_LPF2.8 U1_LPF3.8 U1_LPF4.8 | length 284.9
  Top Layer w0.254: U1_LPF1.8@11.994,29.729 9.409,29.729 6.477,26.797 6.477,6.35 9.017,3.81 v1(35.814,3.81) v1(63.754,3.81) v1@90.536,3.81 ; v1(33.55,15.367) 33.55,26.796 36.366,29.612 U1_LPF2.8@38.861,29.612 ; v1(61.087,15.367) 61.087,27.199 63.488,29.6 U1_LPF3.8@65.984,29.601 ; v1(87.869,15.369) 87.869,27.201 90.27,29.602 U1_LPF4.8@92.766,29.602 ; v1(90.536,3.812) 90.663,3.938 115.063,3.938 v1(115.189,4.064) ; R1F.2@125.603,26.67 125.603,30.099 v1(129.032,33.528) 137.16,33.528 SW-LPFF.1@137.287,33.401
  Bottom Layer w0.254: v1(33.55,15.367) 33.557,15.36 33.557,6.088 v1@35.814,3.831 ; v1(61.087,15.367) 61.087,6.477 v1(63.754,3.81) ; v1(87.869,15.369) 87.869,6.479 v1(90.536,3.812) ; v1(115.189,4.064) 118.056,4.064 119.888,5.896 119.888,29.845 123.571,33.528 v1(129.032,33.528)
LPF_FC_SEL1: R2F.2 SW-LPFF.2 U1_LPF1.7 U1_LPF2.7 U1_LPF3.7 U1_LPF4.7 | length 294.6
  Top Layer w0.254: U1_LPF1.7@11.994,30.379 11.956,30.341 8.116,30.341 5.588,27.813 5.588,5.969 8.763,2.794 v1(34.671,2.794) v1(62.484,2.794) v1(89.281,2.794) 115.803,2.794 116.057,3.048 v1(116.332,3.048) ; v1(32.534,16.637) 32.534,27.685 35.111,30.262 U1_LPF2.7@38.861,30.262 ; v1(59.944,16.637) 59.944,27.961 62.233,30.25 U1_LPF3.7@65.984,30.251 ; v1(86.726,16.639) 86.726,27.963 89.015,30.252 U1_LPF4.7@92.766,30.252 ; R2F.2@128.143,26.67 128.143,29.972 v1(130.302,32.131) SW-LPFF.2@137.287,32.131
  Bottom Layer w0.254: v1(32.534,16.637) 32.534,4.952 v1@34.671,2.815 ; v1(59.944,16.637) 59.944,5.334 v1(62.484,2.794) ; v1(86.726,16.639) 86.726,5.336 v1@89.274,2.787 ; v1(116.332,3.048) 116.607,3.048 116.915,3.356 119.507,3.356 120.904,4.753 120.904,28.956 124.079,32.131 v1(130.302,32.131)